# Altium PCB uMultimeter_ExpGPIO_Pcb.PcbDoc
Units mil, origin at the board's own origin, x right, y up, seen from the top; angles counter-clockwise.
Board outline 455 x 2000 mil, 2 copper layers (Top Layer, Bottom Layer); 4 components, 20 nets, 44 pads, 11 vias.
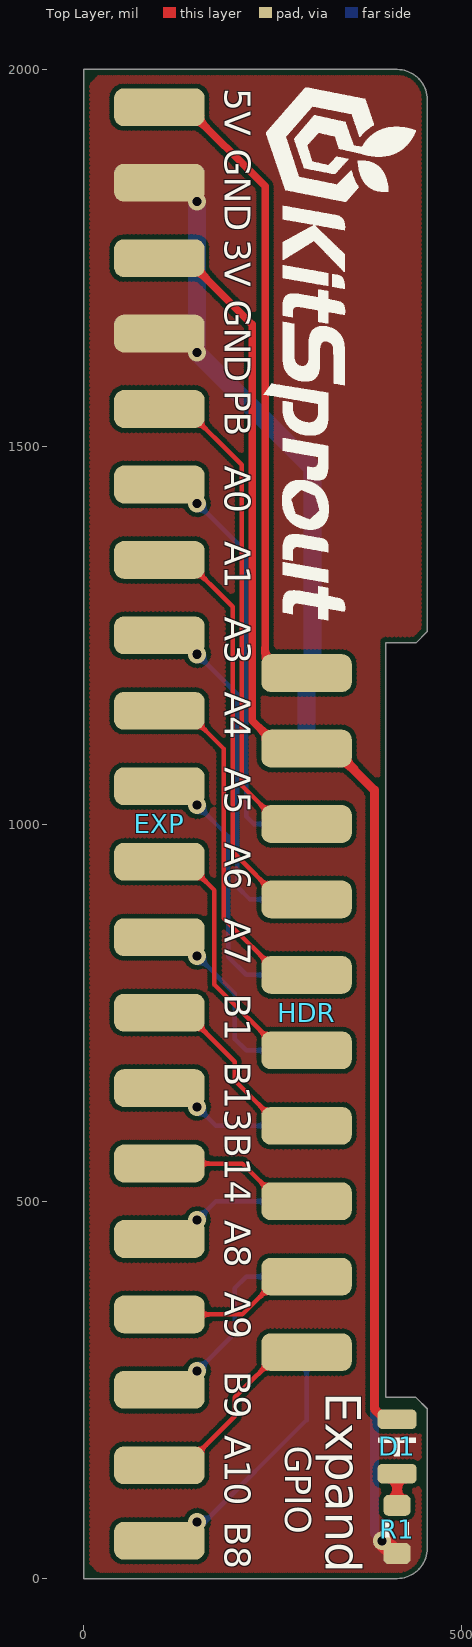
[diagram p0: Top Layer view]
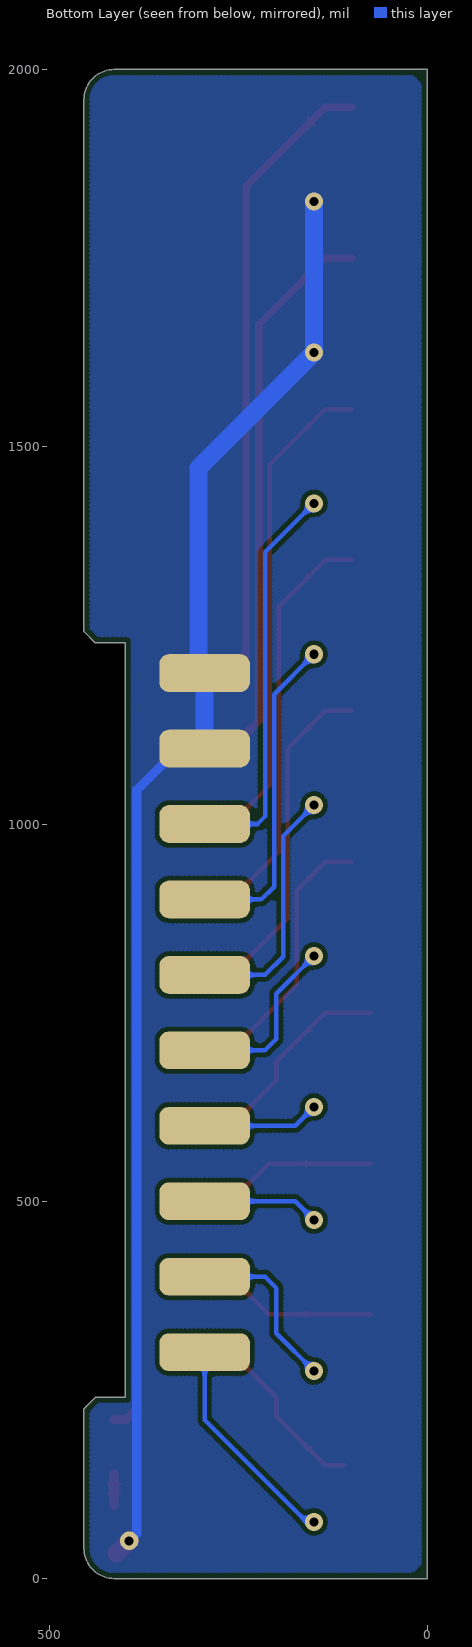
[diagram p1: Bottom Layer view, seen from below]
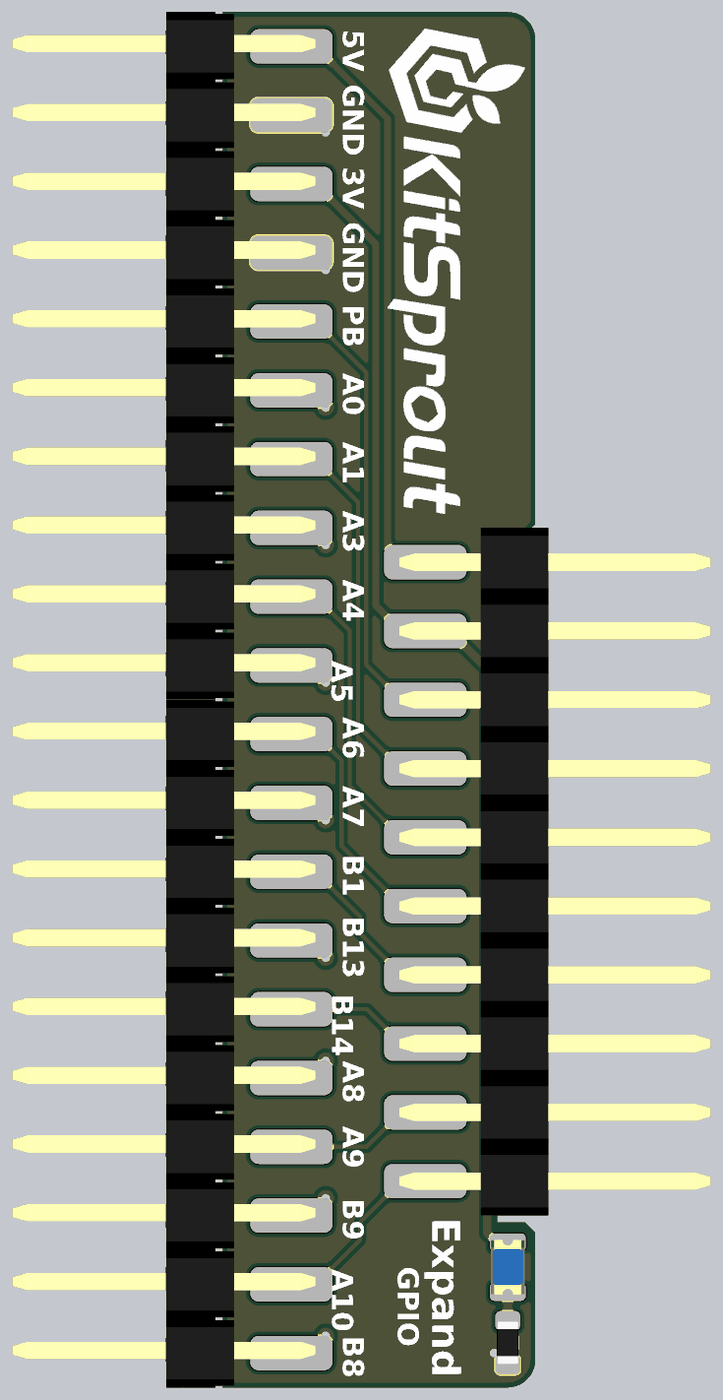
[diagram p2: 3D render of the assembled board from above, using the file's embedded part models]

## Layer stack, top to bottom
Top Solder: solder mask 0.4, Solder Resist, Dk 3.5
Top Layer: signal copper 1.4
Dielectric1: dielectric 12.6, FR-4, Dk 4.8
Bottom Layer: signal copper 1.4
Bottom Solder: solder mask 0.4, Solder Resist, Dk 3.5

## Board outline
0,0 0,2000 415,2000 cw(c415,1960) 455,1960 455,1255 440,1240 400,1240 400,240 440,240 455,225 455,40 cw(c415,40) 415,0

## Design rules (kind name [scope] priority, off if disabled: settings)
Clearance ClearancePolygon [InPolygon] p1: gap=6
Clearance [All] p2: gap=6
ComponentClearance [All] p1: gap=0 collisioncheckmode=3 verticalgap=0 showdistances=FALSE
Height [All] p1: minheight=0 maxheight=5000 prefheight=500
HoleSize [All] p1: absolutevalues=TRUE maxlimit=200 minlimit=1 maxpercent=80.000 minpercent=20.000
HoleToHoleClearance [All] p1: gap=6 allowstackedmicrovias=TRUE
MinimumSolderMaskSliver [All] p1: minsoldermaskwidth=4
PlaneConnect [All] p1: planeconnectstyle=Direct reliefexpansion=20 reliefentries=4 reliefconductorwidth=20 reliefairgap=10
PolygonConnect [All] p1: connectstyle=Direct reliefconductorwidth=20 reliefentries=4 polygonreliefangle="90 Angle" airgapwidth=10
RoutingVias [All] p1: holewidth=12 width=20 viastyle="Through Hole" minholewidth=12 minwidth=20 maxholewidth=100 maxwidth=200
SilkToSilkClearance [All] p1: silktosilkclearance=0
SilkToSolderMaskClearance SilkscreenOverComponentPads [IsPad] p1: minsilkscreentomaskgap=1 clearancetoexposedcopper=TRUE
SolderMaskExpansion [All] p1: expansion=2
Width [All] p1: maxlimit=64 minlimit=6 preferedwidth=10
22 further rules are at their usual default settings.

## Classes and differential pairs
component class EXP: HDR
component class uMultimeter_ExpGPIO_Sch: D1 EXP R1

## Components (designator, comment, footprint, x,y, rotation, side; value= is the part's Value field where it differs from the comment)
D1 "LED_0805" LED_0805_BLUE 415,175 r270 top
EXP "HDR1x20_2.54" HDR1X20_2.54_180H 100,50 r180 top
HDR "HDR2x10_2.54" HDR2X10_2.54_180H 295,1200 r0 top
R1 "Res_0603" RES_0603 415,65 r270 top

## Footprints (in the part's own frame and the unit in brackets; to place one, negate y for a bottom-side part, rotate by r counter-clockwise, add the part's x,y. Pads: shape width x height; smd on the part's side, far side on the other; paste and mask are expansions set on the pad)
HDR1X20_2.54_180H [mil]
  rrect50% 120x50 smd: 1(0,0) 2(0,-100) 3(0,-200) 4(0,-300) 5(0,-400) 6(0,-500) 7(0,-600) 8(0,-700) 9(0,-800) 10(0,-900) 11(0,-1000) 12(0,-1100) 13(0,-1200) 14(0,-1300) 15(0,-1400) 16(0,-1500) 17(0,-1600) 18(0,-1700) 19(0,-1800) 20(0,-1900)
  body extent -35,-1950 406,50, height 49
HDR2X10_2.54_180H [mil]
  rrect50% 120x50 smd: 1(0,0) 3(0,-100) 5(0,-200) 7(0,-300) 9(0,-400) 11(0,-500) 13(0,-600) 15(0,-700) 17(0,-800) 19(0,-900)
  rrect50% 120x50 smd far side: 2(0,0) 4(0,-100) 6(0,-200) 8(0,-300) 10(0,-400) 12(0,-500) 14(0,-600) 16(0,-700) 18(0,-800) 20(0,-900)
  body extent -38,-950 415,50, height 100
LED_0805_BLUE [mil]
  rrect50% 26x52 smd: 1(-36,0) 2(36,0)
  silkscreen extent -12,-25 12,24, body extent -40,-25 40,25, height 43
RES_0603 [mil]
  rrect50% 28x36 smd: 1(-32,0) 2(32,0)
  silkscreen extent -10,-16 10,16, body extent -31,-16 32,16, height 20

## Part data
D1: "LED"
EXP HDR: "Header"
R1: "Resistor"

## Via types
v1: diameter 24, hole 12, Top Layer to Bottom Layer, 11 vias

## Nets (pads, with @x,y where several pads share a name; then routed paths per layer and width w, separated by ;. In a path a pad name is that pad's centre, name@x,y a point inside that pad or via, vN(x,y) a via of type N, cw(c..) or ccw(c..) an arc to the next point about the centre after c; other vN are vias at no path point)
3V3: D1.1 EXP.18 HDR.3 | length 1740.4
  Top Layer w10: EXP.18 135,1750 223,1662 223,1137 260,1100 HDR.3
  Top Layer w12: HDR.3 330,1100 385,1045 385,225 399,211 D1.1
5V: EXP.20 HDR.1 | length 871.8
  Top Layer w10: EXP.20 135,1950 240,1845 240,1220 260,1200 HDR.1
A0: EXP.15 HDR.6 | length 526.1
  Bottom Layer w6: v1(150,1425) 215,1360 215,1010 225,1000 HDR.6
A1: EXP.14 HDR.7 | length 571.8
  Top Layer w6: EXP.14 135,1350 197,1288 197,963 260,900 HDR.7
A3: EXP.13 HDR.8 | length 429
  Bottom Layer w6: v1(150,1225) 203,1172 203,917 220,900 HDR.8
A4: EXP.12 HDR.9 | length 471.8
  Top Layer w6: EXP.12 135,1150 185,1100 185,875 260,800 HDR.9
A5: EXP.11 HDR.10 | length 331.9
  Bottom Layer w6: v1(150,1025) 191,984 191,824 215,800 HDR.10
A6: EXP.10 HDR.11 | length 371.8
  Top Layer w6: EXP.10 135,950 173,912 173,787 260,700 HDR.11
A7: EXP.9 HDR.12 | length 231.9
  Bottom Layer w6: v1(150,825) 200,775 200,715 215,700 HDR.12
A8: EXP.5 HDR.16 | length 155.4
  Bottom Layer w6: v1(150,475) 175,500 HDR.16
A9: EXP.4 HDR.17 | length 240.7
  Top Layer w6: EXP.4@75,350 210,350 260,400 HDR.17
A10: EXP.2 HDR.19 | length 261.8
  Top Layer w6: EXP.2@110,150 135,150 200,215 200,240 260,300 HDR.19
B1: EXP.8 HDR.13 | length 296.8
  Top Layer w6: EXP.8@75,750 135,750 200,685 200,660 260,600 HDR.13
B8: EXP.1 HDR.20 | length 280.9
  Bottom Layer w6: v1@160,75 295,210 HDR.20
  other v1: 150,75
B9: EXP.3 HDR.18 | length 231.9
  Bottom Layer w6: v1(150,275) 200,325 200,385 215,400 HDR.18
B13: EXP.7 HDR.14 | length 155.4
  Bottom Layer w6: v1(150,625) 175,600 HDR.14
B14: EXP.6 HDR.15 | length 240.7
  Top Layer w6: EXP.6@75,550 210,550 260,500 HDR.15
GND: EXP.17 EXP.19 HDR.2 HDR.4 R1.2 | length 1927.7
  Top Layer w24: v1(395,50) R1.2@412,33
  Bottom Layer w12: HDR.4 330,1100 385,1045 385,60 v1(395,50)
  Bottom Layer w24: v1(150,1825) v1(150,1625) 303,1472 303,1208 HDR.2 HDR.4
NetD1_2: D1.2 R1.1 | length 42
  Top Layer w12: R1.1 D1.2
PROBE: EXP.16 HDR.5 | length 671.8
  Top Layer w6: EXP.16 135,1550 209,1476 209,1051 260,1000 HDR.5

## Polygon pours and split planes (outlines as drawn)
GND on Top Layer "Top Layer-No Net" (hatched 45Degree grid 4 track 6, remove dead copper, pour order 10): 20,1990 10,1980 10,20 20,10 415,10 ccw(c415,40) 445,40 445,220 435,230 395,230 390,235 390,1245 395,1250 435,1250 445,1260 445,1960 ccw(c415,1960) 415,1990
GND on Bottom Layer "Top Layer-No Net" (hatched 45Degree grid 4 track 6, remove dead copper, pour order 12): 20,1990 10,1980 10,20 20,10 415,10 ccw(c415,40) 445,40 445,220 435,230 395,230 390,235 390,1245 395,1250 435,1250 445,1260 445,1960 ccw(c415,1960) 415,1990

## Silkscreen, mask and mechanical layers (free items; w line width, h text height)
Top Overlay:
  drawing of 5028 lines, arcs and shapes, not listed
  text "5V" at 175,1975 h60 r270
  text "GND" at 175,1895 h60 r270
  text "3V" at 175,1775 h60 r270
  text "GND" at 175,1695 h60 r270
  text "PB" at 175,1575 h60 r270
  text "A0" at 175,1475 h60 r270
  text "A1" at 175,1375 h60 r270
  text "A3" at 175,1275 h60 r270
  text "A4" at 175,1175 h60 r270
  text "A5" at 174.56,1075 h60 r270
  text "A6" at 175,975 h60 r270
  text "A7" at 175,875 h60 r270
  text "B1" at 175,775 h60 r270
  text "B13" at 175,685 h60 r270
  text "B14" at 175,590 h60 r270
  text "A8" at 175,475 h60 r270
  text "A9" at 175,380 h60 r270
  text "B9" at 175,275 h60 r270
  text "Expand" at 305,246.93 h80 r270
  text "A10" at 175,190 h60 r270
  text "GPIO" at 255,175.93 h60 r270
  text "B8" at 175,75 h60 r270
Mechanical 1:
  the board outline again, w2